# Altium PCB PCB.PcbDoc
Units mm, origin at the board's own origin, x right, y up, seen from the top; angles counter-clockwise.
Board outline 95 x 102.5 mm, 2 copper layers (Top Layer, Bottom Layer), stack 1.571 mm thick; 56 components, 43 nets, 162 pads, 1 vias.
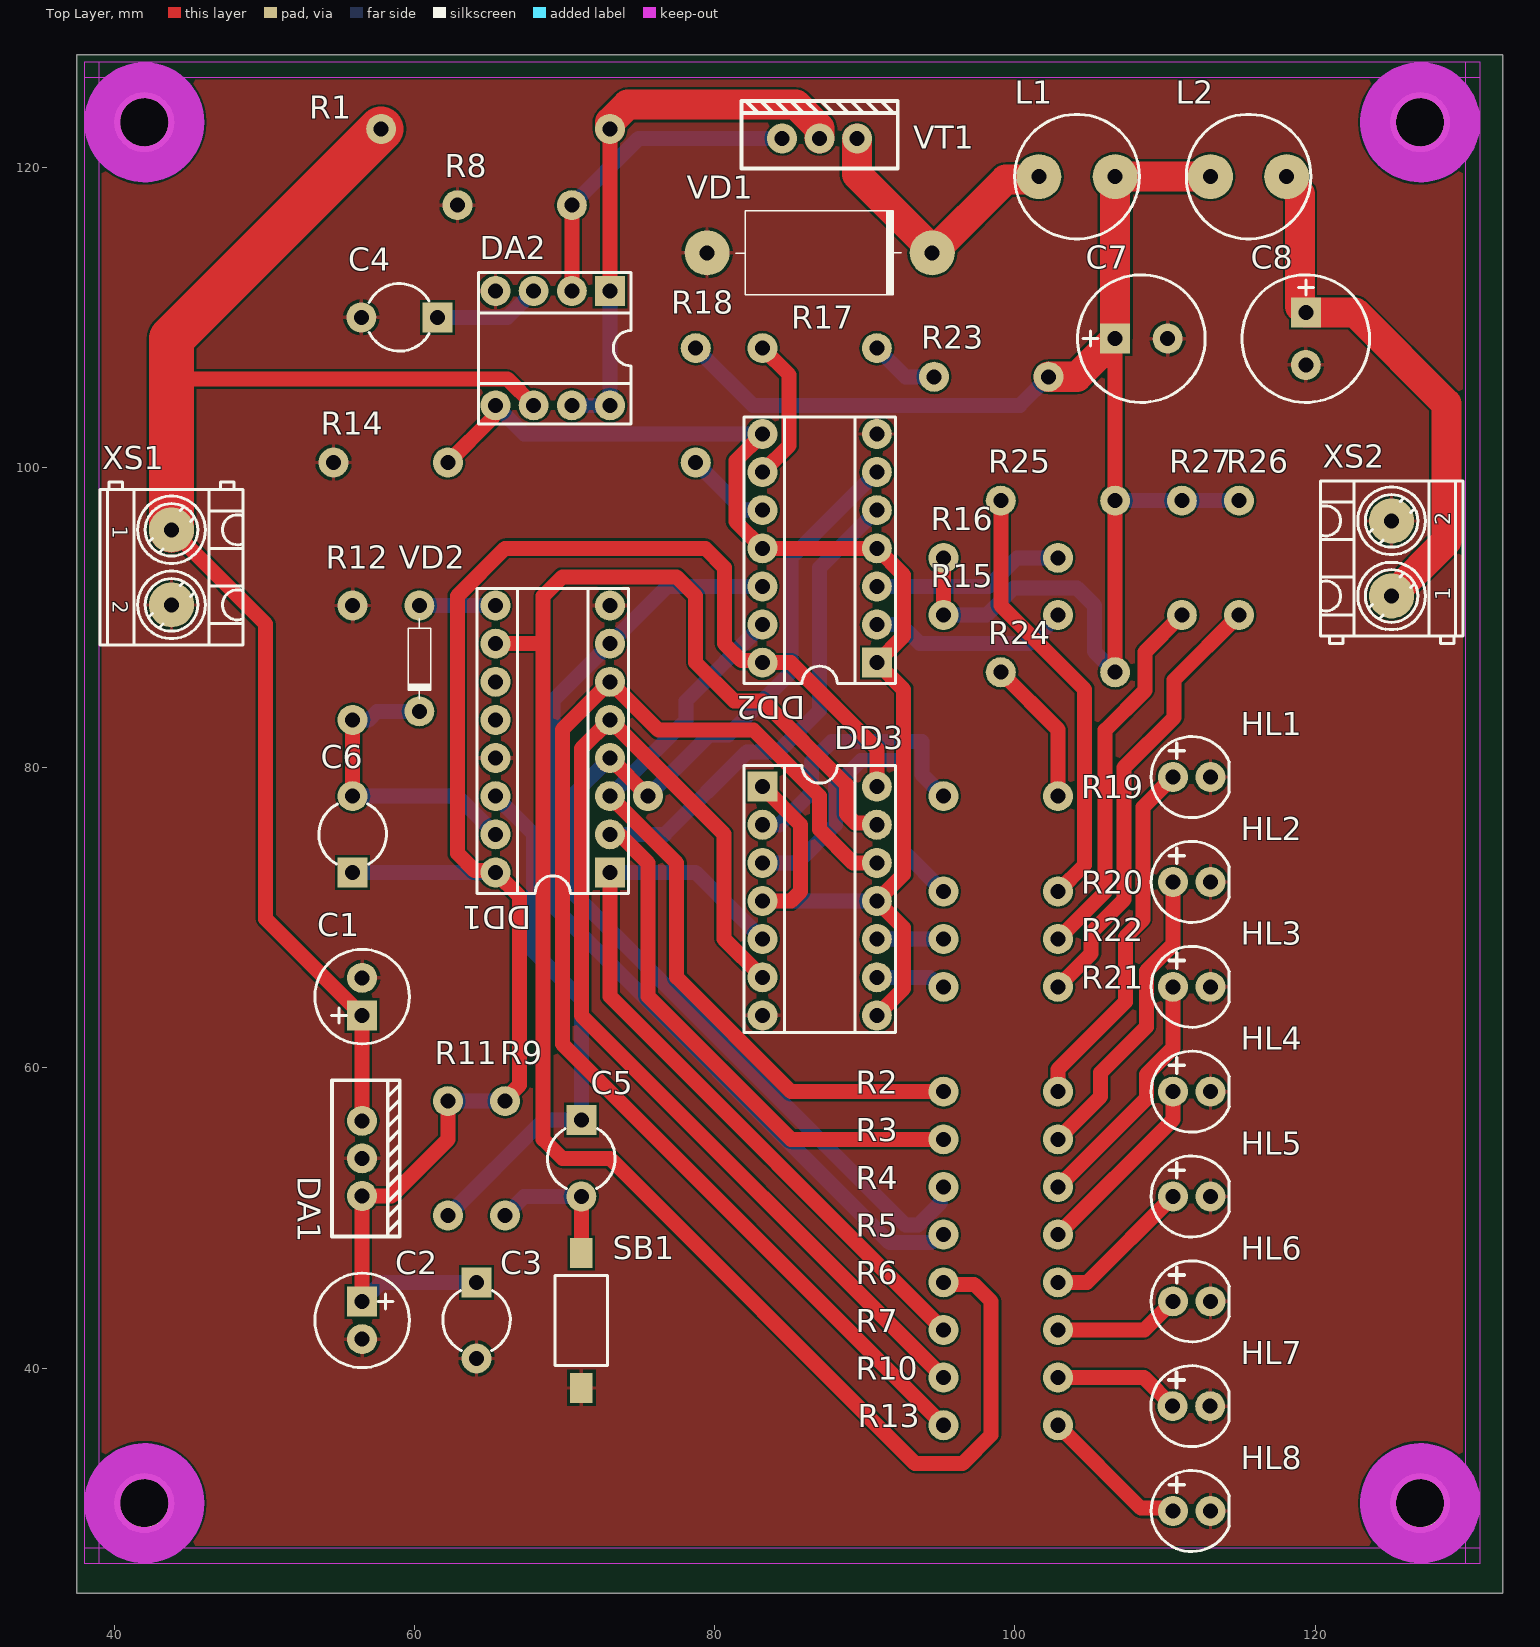
[diagram p0: Top Layer view]
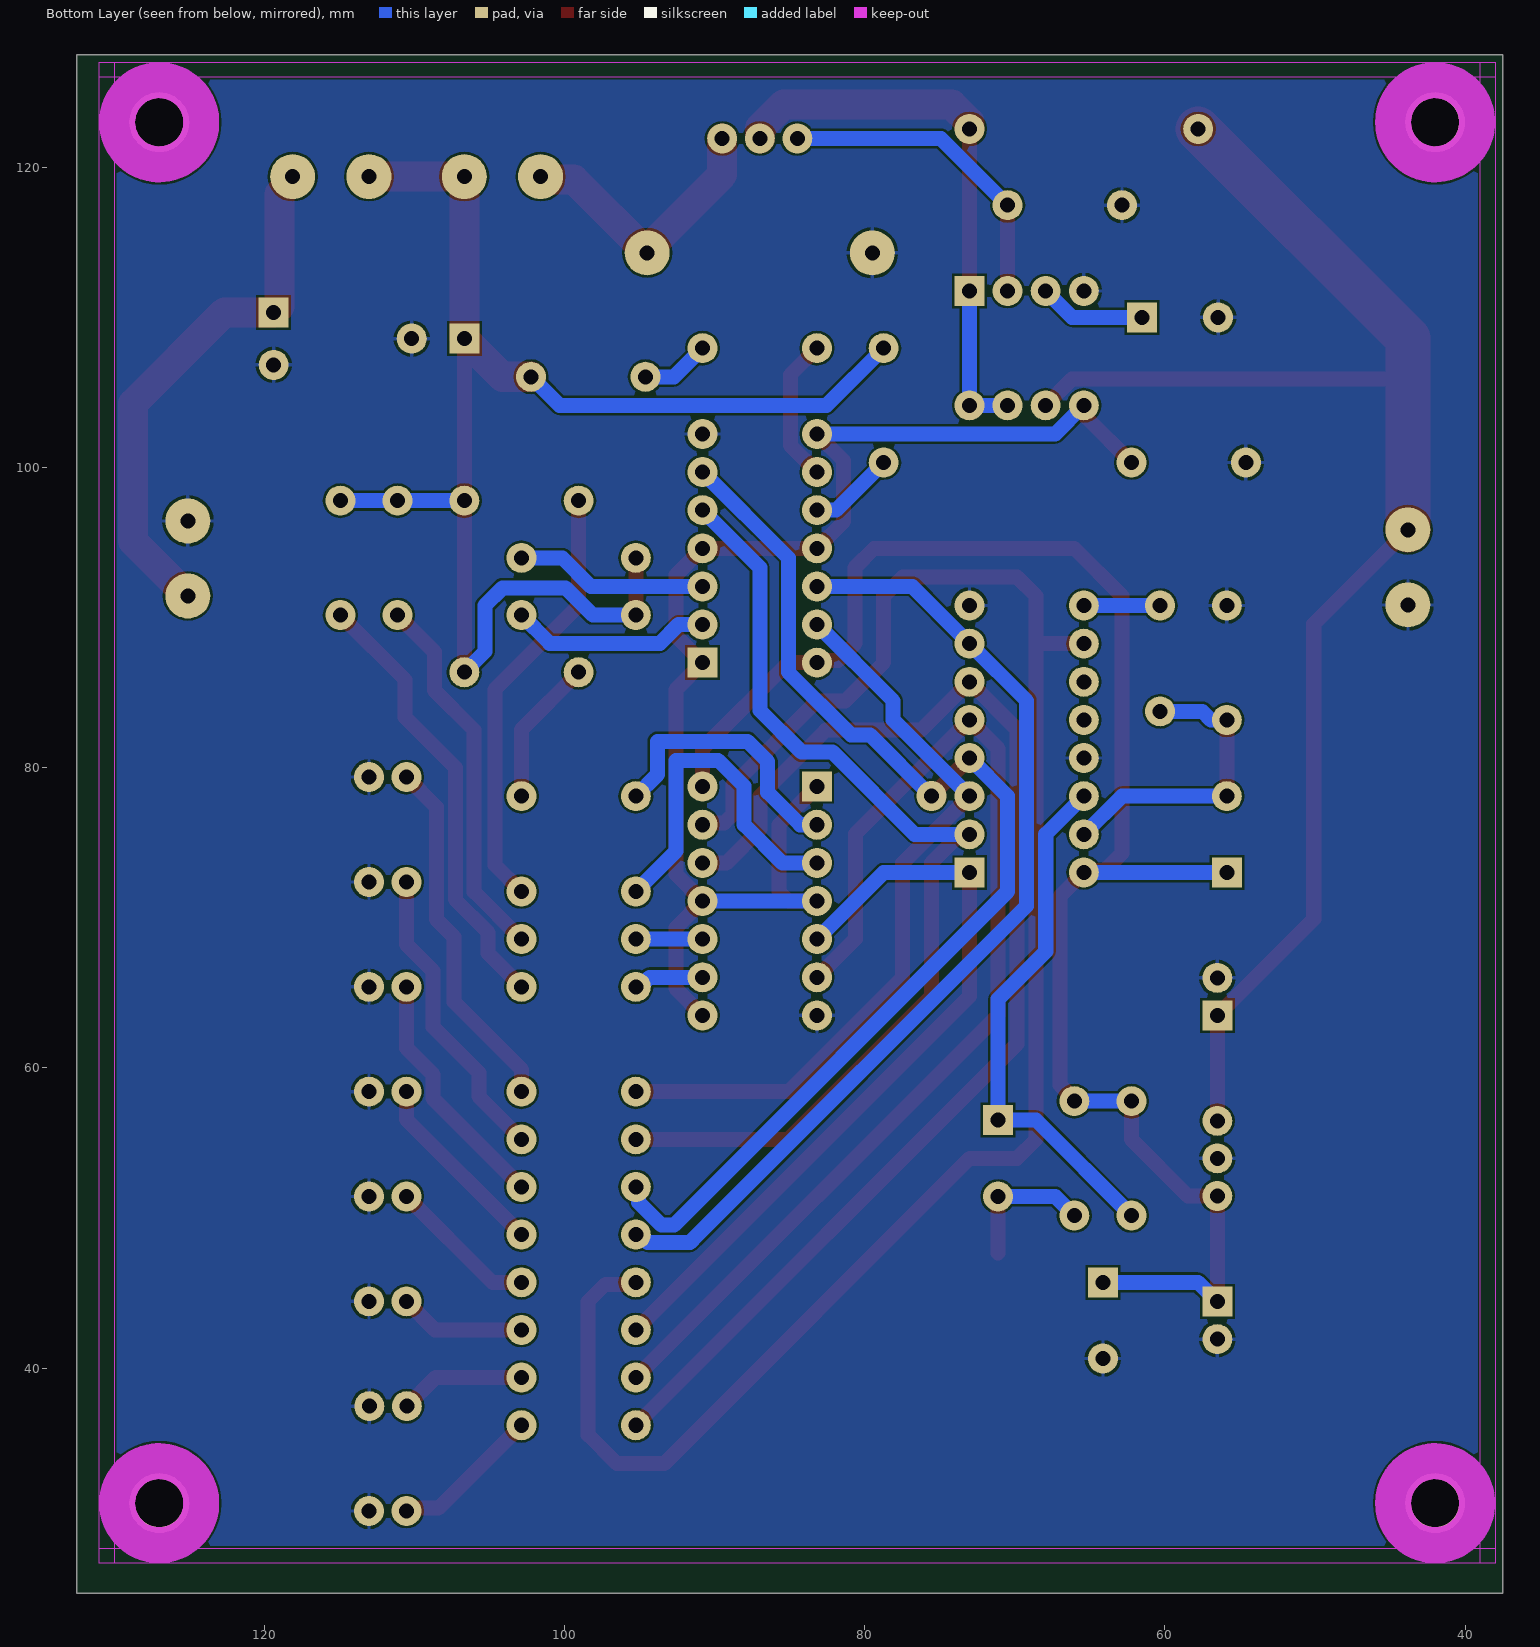
[diagram p1: Bottom Layer view, seen from below]
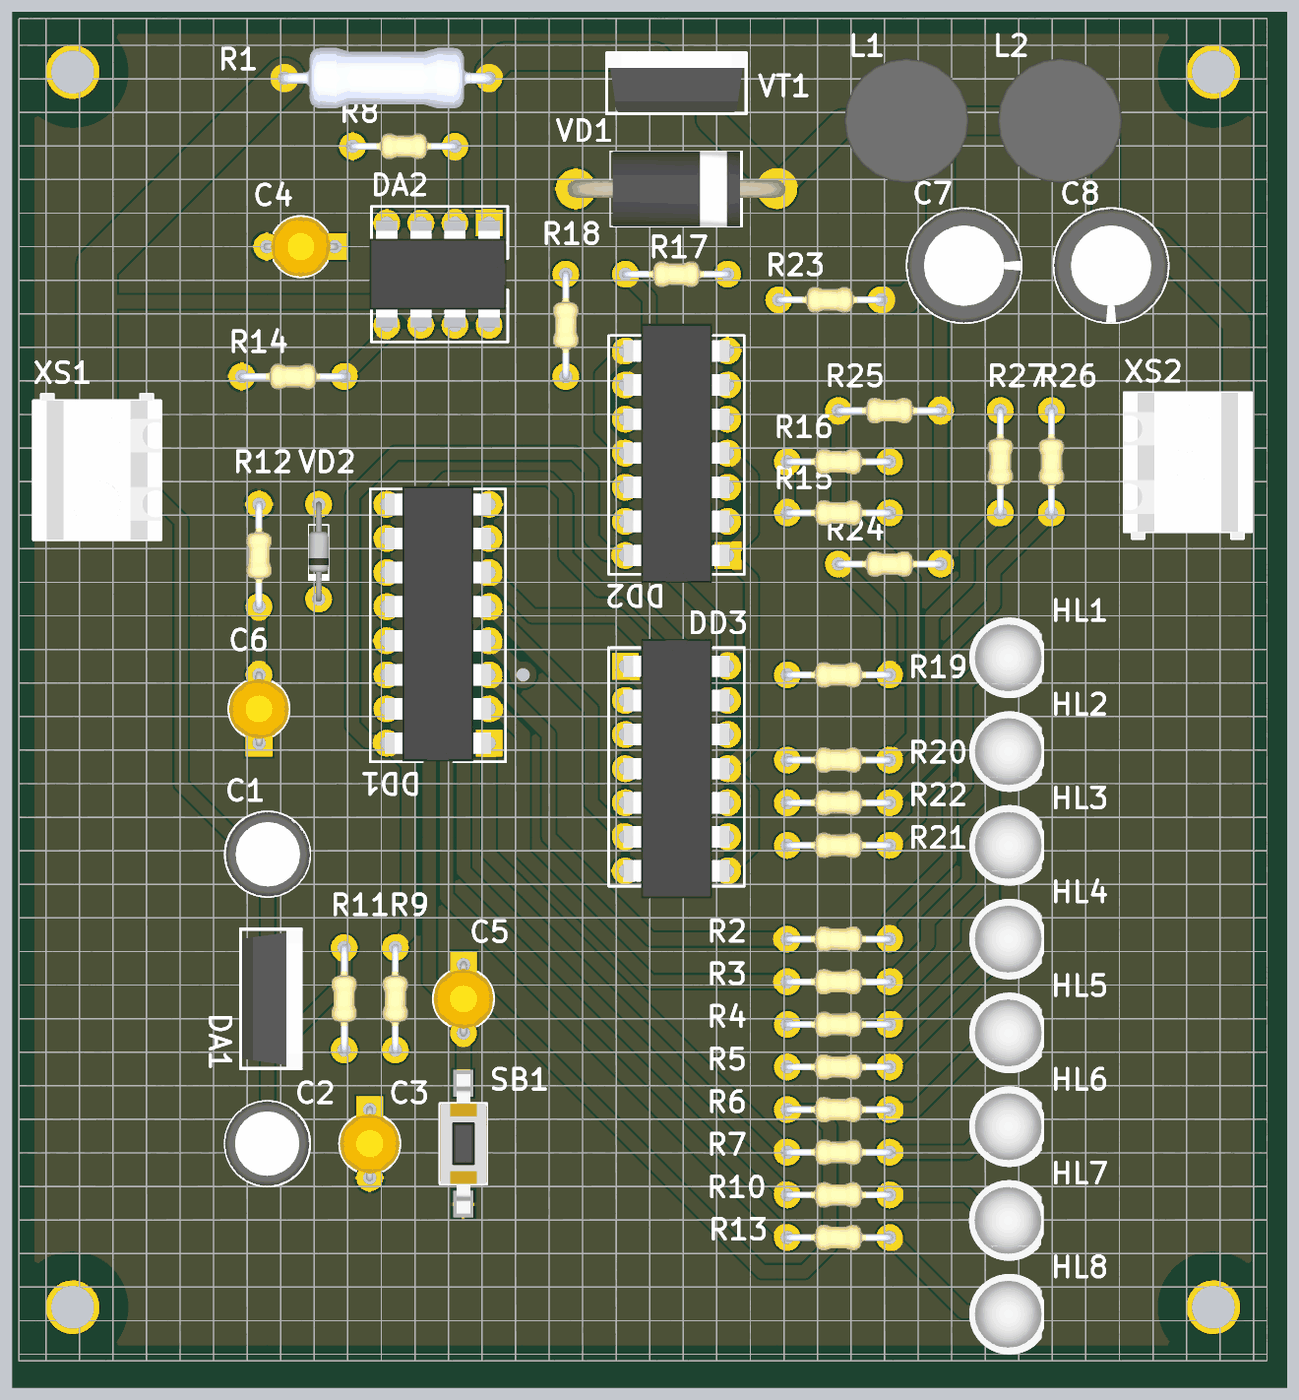
[diagram p2: 3D render of the assembled board from above, using the file's embedded part models]

## Layer stack, top to bottom
Top Solder: solder mask 0.0102, Solder Resist, Dk 3.5
Top Layer: signal copper 0.0356
Dielectric 1: dielectric 1.5, FR-4, Dk 4.8
Bottom Layer: signal copper 0.0356
Bottom Solder: solder mask 0.0102, Solder Resist, Dk 3.5

## Board outline
37.5,25 37.5,127.5 132.5,127.5 132.5,25

## Design rules (kind name [scope] priority, off if disabled: settings)
AcuteAngle [All] p1: minimum=3.50000000000000E+0001 checktracksonly=FALSE
BoardOutlineClearance "BoardOutlineClearance 1" [All] p1: gap=0.25 ignorepadtopadclearanceinfootprint=FALSE except(0: Arc-SplitContinuation Track-SplitContinuation SMDPad-SplitContinuation THPad-SplitContinuation Via-SplitContinuation Fill-SplitContinuation Poly-SplitContinuation Region-SplitContinuation Text-SplitContinuation) // Milling
Clearance "Clearance-1 1/2 Oz" [All] p1: gap=0.15 ignorepadtopadclearanceinfootprint=FALSE // Standart
ComponentClearance [All] p1: gap=0.1 collisioncheckmode=3 verticalgap=0.1 showdistances=FALSE
DiffPairsRouting "DiffPairsRouting 1/2 Oz" [All] p1: maxlimit=0.254 minlimit=0.125 mostfreqgap=0.254 toplayer_minwidth=0.125 toplayer_maxwidth=0.381 toplayer_prefwidth=0.381 bottomlayer_minwidth=0.125 bottomlayer_maxwidth=0.381 bottomlayer_prefwidth=0.381 maxuncoupledlength=12.7
Height [All] p1: minheight=0 maxheight=50 prefheight=12.7
HoleSize "Minimum HoleSize" [IsPad] p1: absolutevalues=TRUE maxlimit=5.9 minlimit=0.6 maxpercent=80.000 minpercent=20.000
HoleSize "Minimum HoleSize VIA 1" [IsVia] p2: absolutevalues=TRUE maxlimit=5.9 minlimit=0.3 maxpercent=80.000 minpercent=20.000 // Standart
HoleToHoleClearance Hole2HoleClearance [All] p1: gap=0.25 allowstackedmicrovias=FALSE
MinimumAnnularRing "Minimum AR VIA Standart" [All] p1: minimumring=0.15
MinimumAnnularRing "Minimum AR PAD Standart" [All] p2: minimumring=0.2
MinimumSolderMaskSliver "SolderMask Bridge Standart" [All] p1: minsoldermaskwidth=0.15 // All Masks
PlaneClearance "PlaneClearance-1 1/2 Oz" [All] p1: clearance=0.2 // Standart
PlaneConnect "TermalConnect-1 1/2 Oz" [All] p1: planeconnectstyle=Relief reliefexpansion=0.2 reliefentries=4 reliefconductorwidth=0.2 reliefairgap=0.2 // Standart
PolygonConnect "PolygonConnect-1 1/2 Oz" [All] p1: thpad.connectstyle=Relief thpad.reliefconductorwidth=0.254 thpad.reliefentries=4 thpad.polygonreliefangle="90 Angle" thpad.airgapwidth=0.2 smdpad.connectstyle=Relief smdpad.reliefconductorwidth=0.254 smdpad.reliefentries=4 smdpad.polygonreliefangle="90 Angle" smdpad.airgapwidth=0.2 via.connectstyle=Direct via.reliefconductorwidth=0.254 via.reliefentries=4 via.polygonreliefangle="90 Angle" via.airgapwidth=0.254 // Standart
RoutingCorners [All] p1 off: cornerstyle=45-Degree minsetback=2.54 maxsetback=2.54
RoutingVias [All] p1: holewidth=0.4 width=0.8 viastyle="Through Hole" minholewidth=0.3 minwidth=0.6 maxholewidth=5.9 maxwidth=8.9
SilkToSilkClearance Silk2SilkClearance [All] p1 off: silktosilkclearance=0.15
SilkToSolderMaskClearance Silk2SolderMaskClearance [IsPad] p1 off: minsilkscreentomaskgap=0.15 clearancetoexposedcopper=TRUE
SolderMaskExpansion SolderMaskExpansion-1 [All] p1: expansion=0.05 istentingtop=FALSE // Standart
UnRoutedNet [All] p1: checkbadconnections=TRUE
Width "Width 1/2 Oz" [All] p1: maxlimit=5 minlimit=0.75 preferedwidth=1 checkconnectedcopper=TRUE
18 further rules are at their usual default settings.

## Components (designator, comment, footprint, x,y, rotation, side; value= is the part's Value field where it differs from the comment)
C1 "100uF 25V" CAPPR250-630X1120 56.515,64.75 r90 top
C2 "100uF 25V" CAPPR250-630X1120 56.515,43.18 r270 top
C3 "Cap Ceramic 0.1uF" CAPPRB508-450X850 64.135,43.18 r270 top
C4 "Cap Ceramic 470pF" CAPPRB508-450X850 59,110 r180 top
C5 "Cap Ceramic 0.1uF" CAPPRB508-450X850 71.12,53.975 r270 top
C6 "Cap Ceramic 0.1uF" CAPPRB508-450X850 55.88,75.565 r90 top
C7 "470uF 25V" CAPPR350-850X1300 108.43,108.585 r0 top
C8 "470uF 25V" CAPPR350-850X1300 119.38,108.585 r270 top
DA1 "L7809ABV" TO-220AB 56.515,53.975 r270 top
DA2 "MC34063ABN" DIPS8-300 69.215,107.95 r270 top
DD1 "CD4017BE" DIPS16-300 69.215,81.915 r180 top
DD2 "CD4066BE" DIPS14-300 86.995,94.615 r180 top
DD3 "CD4066BE" DIPS14-300 86.995,71.12 r0 top
HL1 "LED Red" LD-5mm-R 111.78,79.375 r0 top
HL2 "LED Red" LD-5mm-R 111.78,72.39 r0 top
HL3 "LED Red" LD-5mm-R 111.78,65.405 r0 top
HL4 "LED Red" LD-5mm-R 111.78,58.42 r0 top
HL5 "LED Red" LD-5mm-R 111.78,51.435 r0 top
HL6 "LED Red" LD-5mm-R 111.78,44.45 r0 top
HL7 "LED Red" LD-5mm-R 111.76,37.465 r0 top
HL8 "LED Red" LD-5mm-R 111.78,30.48 r0 top
L1 "КИ (КИГ) 3,0−100мкГн ±5%" INDRD_WURTH_WE-TI 104.14,119.38 r0 top
L2 "КИ (КИГ) 3,0−100мкГн ±5%" INDRD_WURTH_WE-TI 115.57,119.38 r0 top
R1 "0,1Ом" "Res 1W" 66.675,116.205 r180 top
R2 "1кОм" "Res 0.125W" 96.52,58.42 r180 top
R3 "1кОм" "Res 0.125W" 96.52,55.245 r180 top
R4 "1кОм" "Res 0.125W" 96.52,52.07 r180 top
R5 "1кОм" "Res 0.125W" 96.52,48.895 r180 top
R6 "1кОм" "Res 0.125W" 96.52,45.72 r180 top
R7 "1кОм" "Res 0.125W" 96.52,42.545 r180 top
R8 "22кОм" "Res 0.125W" 69.215,117.475 r0 top
R9 "100кОм" "Res 0.125W" 66.04,56.515 r90 top
R10 "1кОм" "Res 0.125W" 96.52,39.37 r180 top
R11 "100кОм" "Res 0.125W" 62.23,56.515 r90 top
R12 "100кОм" "Res 0.125W" 55.88,84.455 r270 top
R13 "1кОм" "Res 0.125W" 96.52,36.195 r180 top
R14 "1кОм" "Res 0.125W" 60.96,100.33 r0 top
R15 "270Ом" "Res 0.125W" 96.52,90.17 r180 top
R16 "1кОм" "Res 0.125W" 96.52,93.98 r180 top
R17 "2кОм" "Res 0.125W" 89.535,107.95 r0 top
R18 "3,9кОм" "Res 0.125W" 78.74,106.68 r90 top
R19 "4,3кОм" "Res 0.125W" 101.6,78.105 r0 top
R20 "5,6кОм" "Res 0.125W" 101.6,71.755 r0 top
R21 "7,5кОм" "Res 0.125W" 101.6,65.405 r0 top
R22 "9,1кОм" "Res 0.125W" 101.6,68.58 r0 top
R23 "100Ом" "Res 0.125W" 100.965,106.045 r0 top
R24 "200Ом" "Res 0.125W" 105.41,86.36 r0 top
R25 "200Ом" "Res 0.125W" 105.41,97.79 r0 top
R26 "100Ом" "Res 0.125W" 114.935,96.52 r90 top
R27 "300Ом" "Res 0.125W" 111.125,96.52 r90 top
SB1 "Button SMD" "Button SMD" 71.12,43.18 r180 top
VD1 "1N5820" DO-27 86.995,114.3 r0 top
VD2 "1N4002" DO-35 60.325,87.28 r270 top
VT1 "TIP121G" TO-220AB 86.995,121.92 r0 top
XS1 "Power Connector 2 pin" WIELAND_25.161.0253.0 43.815,93.345 r270 top
XS2 "Power Connector 2 pin" WIELAND_25.161.0253.0 125.095,93.94 r90 top

## Footprints (in the part's own frame and the unit in brackets; to place one, negate y for a bottom-side part, rotate by r counter-clockwise, add the part's x,y. Pads: shape width x height; smd on the part's side, far side on the other; paste and mask are expansions set on the pad)
"Button SMD" [mm]
  rect 1.5x2 smd: 1(0,4.5) 2(0,-4.5)
  silkscreen extent -1.75,-3 1.75,3, body extent -1.75,-5.2 1.75,5.2, height 5.01
CAPPR250-630X1120 [mm] "Capacitor, Radial, Pin spacing 2.5mm - Body Diameter 6.3mm X Body Height 11.2mm"
  rect 2x2 hole 1: 1(-1.25,0)
  round 2 hole 1: 2(1.25,0)
  silkscreen extent -3.15,-3.15 3.15,3.15, body extent -3.16,-3.16 3.14,3.11, height 11.2
CAPPR350-850X1300 [mm] "Capacitor, Radial, Pin spacing 3.5mm - Body Diameter 8.5mm x Body Height 13mm"
  rect 2x2 hole 1: 1(-1.75,0)
  round 2 hole 1: 2(1.75,0)
  silkscreen extent -4.25,-4.25 4.25,4.25, body extent -4.25,-4.25 4.25,4.25, height 13
CAPPRB508-450X850 [mm] "Capacitor, Polarized Radial Bead, Pin spacing 5.08mm - Body Diameter 4.5mm X Body Height 8.5mm"
  rect 2x2 hole 1: 1(-2.54,0)
  round 2 hole 1: 2(2.54,0)
  silkscreen extent -1.98,-2.25 2.01,2.25, body extent -2.79,-2.25 2.79,2.25, height 8.97
DIPS8-300 [mm] "DIP Socket 8 Leads, Row Spacing 7.62 mm; Pitch 2.54 mm"
  rect 2x2 hole 1: 1(-3.81,3.81)
  round 2 hole 1: 2(-3.81,1.27) 3(-3.81,-1.27) 4(-3.81,-3.81) 5(3.81,-3.81) 6(3.81,-1.27) 7(3.81,1.27) 8(3.81,3.81)
  silkscreen extent -5.05,-4.95 5.05,5.21, body extent -3.96,-5.1 3.96,5.1, height 4.2
DIPS14-300 [mm] "DIP  Socket 14 Leads, Row Spacing 7.62 mm; Pitch 2.54 mm"
  rect 2x2 hole 1: 1(-3.81,7.62)
  round 2 hole 1: 2(-3.81,5.08) 3(-3.81,2.54) 4(-3.81,0) 5(-3.81,-2.54) 6(-3.81,-5.08) 7(-3.81,-7.62) 8(3.81,-7.62) 9(3.81,-5.08) 10(3.81,-2.54) 11(3.81,0) 12(3.81,2.54) 13(3.81,5.08) 14(3.81,7.62)
  silkscreen extent -5.05,-8.76 5.05,9.02, body extent -3.96,-9.65 3.96,9.65, height 3.4
DIPS16-300 [mm] "DIP Socket 16 Leads, Row Spacing 7.62 mm; Pitch 2.54 mm"
  rect 2x2 hole 1: 1(-3.81,8.89)
  round 2 hole 1: 2(-3.81,6.35) 3(-3.81,3.81) 4(-3.81,1.27) 5(-3.81,-1.27) 6(-3.81,-3.81) 7(-3.81,-6.35) 8(-3.81,-8.89) 9(3.81,-8.89) 10(3.81,-6.35) 11(3.81,-3.81) 12(3.81,-1.27) 13(3.81,1.27) 14(3.81,3.81) 15(3.81,6.35) 16(3.81,8.89)
  silkscreen extent -5.05,-10.03 5.05,10.29, body extent -3.96,-10.25 3.96,10.25, height 3.4
DO-27 [mm]
  round 3 hole 1: 1(-7.5,0) 2(7.5,0)
  silkscreen extent -5.6,-2.8 5.45,2.8, body extent -8.15,-2.81 8.15,2.81, height 5.59
DO-35 [mm]
  round 2 hole 1: 1(-3.525,0) 2(3.525,0)
  silkscreen extent -2.65,-0.8 2.67,0.75, body extent -3.73,-0.76 3.72,0.76, height 3.01
INDRD_WURTH_WE-TI [mm] "Radial Leaded Wire Wound Inductor D=8.3mm"
  round 3 hole 1: 1(-2.54,0) 2(2.54,0)
  silkscreen extent -4.15,-4.15 4.15,4.15, body extent -4.65,-4.65 4.65,4.65, height 10
LD-5mm-R [mm] "5mm DIP Red Led Footprint"
  round 2 hole 1: 1(-1.25,0) 2(1.25,0)
  silkscreen extent -2.7,-2.7 2.51,2.7, body extent -2.98,-3.01 2.44,3.01, height 13.31
"Res 0.125W" [mm]
  round 2 hole 1: 1(-6.35,0) 2(1.27,0)
  body extent -6.6,-0.95 1.52,0.95, height 2.45
"Res 1W" [mm]
  round 2 hole 1: 1(-6.35,-6.35) 2(8.89,-6.35)
  body extent -6.75,-8.6 9.29,-4.1, height 5.25
TO-220AB [mm] "КТ-28-2"
  round 2 hole 1: 1(-2.5,0) 2(0,0) 3(2.5,0)
  silkscreen extent -5.2,-2 5.2,2.5, body extent -5.1,-1.9 5.1,2.6, height 26.06
WIELAND_25.161.0253.0 [mm] "Terminal Block, Pitch 5mm, 2 Positions, Screw Connection"
  round 3 hole 1: 1(-2.5,0) 2(2.5,0)
  silkscreen extent -5.68,-4.75 5.17,4.75, body extent -5.67,-4.75 5.18,4.75, height 15

## Part data
C1 C2: library part "Cap Polarity 100uF 25V", "ECAP TKR101M1EE11 25В 100мкФ ±5% (Jamicon, Китай)", Type=Конденсатор
C3 C5 C6: "CAP X7R RDER71H104K 25В 0.1мкФ ±10% (Murata, Япония)", Type=Конденсатор
C4: "CAP NPO RDE5C1H471J 25В 470пкФ ±5% (Murata, Япония)", Type=Конденсатор
C7 C8: library part "Cap Polarity 470uF 25V", "ECAP TKR471M1EF14 25В 470мкФ ±5% (Jamicon, Китай)", Type=Конденсатор
DA1: "L7809ABV (STMicroelectronics, Швейцария)"
DA2: "MC34063ABN (STMicroelectronis, Швейцария)"
DD1: "CD4017BE (Texas Instuments, США)"
DD2 DD3: "CD4066BE (HGSEMI, Китай)"
HL1 HL2 HL3 HL4 HL5 HL6 HL7 HL8: "GNL-5012ED (G-nor Electronics, Китай)"
L1 L2: library part "Inductor КИ (КИГ) 3,0−100мкГн ±5%", "КИ (КИГ) 3,0−100мкГн ±10% (Россия)"
R1: library part "Res 0,1 1W", "С1-4−1−0,1Ом ±5% (Россия)"
R2 R3 R4 R5 R6 R7 R10 R13: library part "Res 1K 0.125W", "С1-4−0,125−1кОм ±5% (Россия)"
R8: library part "Res 22K 0.125W", "С1-4−0,125−22кОм ±5% (Россия)"
R9 R11 R12: library part "Res 100K 0.125W", "С1-4−0,125−100кОм ±5% (Россия)"
R14 R16: library part "Res 1,5K 0.125W", "С1-4−0,125−1,5кОм ±5% (Россия)"
R15: library part "Res 270 0.125W", "С1-4−0,125−270Ом ±5% (Россия)"
R17: library part "Res 2K 0.125W", "С1-4−0,125−2кОм ±5% (Россия)"
R18: library part "Res 3,9K 0.125W", "С1-4−0,125−3,9кОм ±5% (Россия)"
R19: library part "Res 4,3K 0.125W", "С1-4−0,125−4,3кОм ±5% (Россия)"
R20: library part "Res 5,6K 0.125W", "С1-4−0,125−5,6кОм ±5% (Россия)"
R21: library part "Res 7,5K 0.125W", "С1-4−0,125−7,5кОм ±5% (Россия)"
R22: library part "Res 9,1K 0.125W", "С1-4−0,125−9,1кОм ±5% (Россия)"
R23 R26: library part "Res 100 0.125W", "С1-4−0,125−100Ом ±5% (Россия)"
R24 R25: library part "Res 200 0.125W", "С1-4−0,125−200Ом ±5% (Россия)"
R27: library part "Res 300 0.125W", "С1-4−0,125−300Ом ±5% (Россия)"
SB1: library part Button, "Кнопка тактовая 1437566-3 (TE Connectivity, США)"
VD1: library part "Diode 1N5820", "1N5820 (Diotec, Германия)"
VD2: library part "Diode 1N4148", "1N4148 (Diotec, Германия)", Published=18.05.2010, Publisher="Andrew Danich", Type=Диод
VT1: library part "Transistor TIP121G", "TIP121G (ON Semiconductor, США)"
XS1 XS2: "25.161.0253.0 (Wieland Electric, Германия)"

## Free pads (board coordinates)
  round 4 hole 3.2 unplated: 0(42,31) 0(42,123) 0(127,31) 0(127,123)

## Via types
v1: diameter 2, hole 1, Top Layer to Bottom Layer, tented both sides, 1 vias

## Nets (pads, with @x,y where several pads share a name; then routed paths per layer and width w, separated by ;. In a path a pad name is that pad's centre, name@x,y a point inside that pad or via, vN(x,y) a via of type N, cw(c..) or ccw(c..) an arc to the next point about the centre after c; other vN are vias at no path point)
1: DD1.3 DD2.13 R2.2 | length 50.5
  Top Layer w1: DD1.3 77.47,73.66 77.47,66.04 85.09,58.42 R2.2
  Bottom Layer w1: DD1.3 78.105,83.185 78.105,84.455 DD2.13
2: DD1.2 DD2.5 R3.2 | length 68.2
  Top Layer w1: DD1.2 73.66,75.565 75.565,73.66 75.565,64.77 85.09,55.245 R3.2
  Bottom Layer w1: DD1.2 76.678,75.565 82.152,81.039 84.214,81.039 86.995,83.82 86.995,93.345 DD2.5
3: DD1.4 DD2.6 R4.2 | length 77.7
  Top Layer w1: DD1.4 v1(75.565,78.105)
  Bottom Layer w1: DD1.4 70.485,78.105 70.485,71.755 92.717,49.523 93.545,49.523 95.059,51.037 95.059,51.879 R4.2 ; v1(75.565,78.105) 79.648,82.188 80.918,82.188 85.09,86.36 85.09,93.98 DD2.6
4: DD1.7 DD2.12 R5.2 | length 66.3
  Bottom Layer w1: DD2.12 76.835,92.075 DD1.7 69.215,84.455 69.215,70.799 91.119,48.895 91.641,48.373 94.458,48.373 94.979,48.895 R5.2
5: DD1.10 DD3.13 R6.2 | length 124.9
  Top Layer w1: DD1.10 68.58,88.265 ; DD3.13 90.672,76.333 89.353,76.333 88.767,76.919 88.767,78.873 83.185,84.455 81.28,84.455 78.74,86.995 78.74,91.44 77.47,92.71 69.85,92.71 68.58,91.44 68.58,88.265 ; R6.2 95.383,45.587 97.288,45.587 98.425,44.45 98.425,35.56 96.52,33.655 93.345,33.655 73.025,53.975 69.85,53.975 68.58,55.245 68.58,88.265
6: DD1.1 DD3.5 R7.2 | length 51.7
  Top Layer w1: DD1.1 73.025,64.77 R7.2
  Bottom Layer w1: DD1.1 78.74,73.025 DD3.5
7: DD1.5 DD3.6 R10.2 | length 76
  Top Layer w1: DD3.6 80.628,68.597 80.628,75.582 DD1.5 71.12,81.28 71.12,63.5 R10.2
8: DD1.6 DD3.12 R13.2 | length 85.4
  Top Layer w1: DD3.12 89.214,73.66 86.995,75.879 86.995,78.105 82.601,82.499 76.251,82.499 DD1.6 69.85,82.55 69.85,61.595 R13.2
GND: C1.2 C2.2 C3.2 C4.2 C7.2 C8.2 DA1.2 DA2.4 DD1.8 DD1.13 DD2.7 DD3.7 HL1.2 HL2.2 HL3.2 HL4.2 HL5.2 HL6.2 HL7.2 HL8.2 R8.1 R12.1 R14.1 SB1.1 VD1.1 XS1.2 XS2.2
NetC1_1: C1.1 DA1.1 DA2.6 R1.2 XS1.1 | length 101.8
  Top Layer w1: XS1.1 50.089,89.571 50.089,69.926 C1.1 DA1.1 ; 44,105.894 66.191,105.894 DA2.6
  Top Layer w3: XS1.1 43.815,108.585 R1.2
NetC2_1: C2.1 C3.1 C6.1 DA1.3 DD1.16 DD2.14 DD3.14 R9.2 R11.2 | length 115.2
  Top Layer w1: C2.1 DA1.3 58.475,51.475 62.23,55.23 R11.2 ; R9.2 66.04,57.911 67,58.871 67,71.43 DD1.16 65.272,73.158 64.002,73.158 62.865,74.295 62.865,91.44 66.04,94.615 79.375,94.615 80.645,93.345 80.645,88.265 81.782,87.128 83.052,87.128 DD2.14 85.09,86.995 90.805,81.28 DD3.14
  Bottom Layer w1: C6.1 DD1.16 ; C2.1 57.805,45.72 C3.1 ; R11.2 R9.2
NetC4_1: C4.1 DA2.3 | length 7.1
  Bottom Layer w1: C4.1 66.185,110 DA2.3
NetC5_1: C5.1 DD1.14 R11.1 | length 35.5
  Bottom Layer w1: R11.1 68.58,56.515 C5.1 71.12,64.582 67.943,67.759 67.943,75.567 DD1.14
NetC5_2: C5.2 R9.1 SB1.2 | length 9.4
  Top Layer w1: SB1.2 C5.2
  Bottom Layer w1: R9.1 67.31,51.435 C5.2
NetC6_2: C6.2 DD1.15 R12.2 VD2.2 | length 20.3
  Top Layer w1: C6.2 R12.2
  Bottom Layer w1: C6.2 62.865,78.105 DD1.15 ; R12.2 56.947,83.185 57.517,83.755 VD2.2
NetC7_1: C7.1 L1.2 L2.1 R15.2 R16.2 R18.2 R23.2 R24.2 R25.2 R26.2 R27.2 | length 99.1
  Top Layer w1: R15.2 R16.2 ; R24.2 R25.2 C7.1
  Top Layer w2: R23.2 104.14,106.045 C7.1 L1.2 L2.1
  Bottom Layer w1: R18.2 82.55,104.14 100.33,104.14 R23.2 ; R15.2 98.12,90.17 99.924,91.973 104.14,91.973 105.308,90.805 105.308,87.732 R24.2 ; R25.2 R27.2 R26.2
NetC8_1: C8.1 L2.2 XS2.1 | length 35.2
  Top Layer w2: L2.2 118.11,119.109 119,118.219 C8.1@119,110.715 ; C8.1 122.665,110.335 128.746,104.254 128.746,95.091 XS2.1
NetDA2_1: DA2.1 DA2.7 DA2.8 R1.1 VT1.2 | length 37.2
  Top Layer w1: DA2.1 R1.1
  Top Layer w2: R1.1 73.025,123.002 74.197,124.174 85.429,124.174 86.995,122.608 VT1.2
  Bottom Layer w1: DA2.7 DA2.8 DA2.1
NetDA2_2: DA2.2 R8.2 VT1.1 | length 21.6
  Top Layer w1: DA2.2 R8.2
  Bottom Layer w1: R8.2 74.93,121.92 VT1.1
NetDA2_5: DA2.5 DD2.1 DD2.4 DD2.8 DD2.11 DD3.1 DD3.4 DD3.8 DD3.11 R14.2 | length 94.4
  Top Layer w1: R14.2 65.214,103.314 65.214,103.949 DA2.5 ; DD3.4 85.09,71.12 85.725,71.755 85.725,76.2 DD3.1 ; DD2.8 81.407,100.457 81.407,96.393 DD2.11 DD2.4 92.583,92.837 92.583,88.773 DD2.1 92.583,85.217 92.583,72.898 DD3.11 92.583,69.342 92.583,65.278 DD3.8
  Bottom Layer w1: DA2.5 67.31,102.235 DD2.8 ; DD3.4 DD3.11
NetDD1_9: DD1.9 VD2.1 | length 5.1
  Bottom Layer w1: VD2.1 DD1.9
NetDD2_2: DD2.2 R15.1 | length 13.4
  Bottom Layer w1: DD2.2 92.405,89.535 93.65,88.29 100.99,88.29 R15.1
NetDD2_3: DD2.3 R16.1 | length 12.9
  Bottom Layer w1: DD2.3 98.247,92.075 100.152,93.98 R16.1
NetDD2_9: DD2.9 R17.1 | length 9.7
  Top Layer w1: DD2.9 84.963,101.473 84.963,106.172 R17.1
NetDD2_10: DD2.10 R18.1 | length 5.8
  Bottom Layer w1: R18.1 81.915,97.155 DD2.10
NetDD3_2: DD3.2 R19.1 | length 18.4
  Bottom Layer w1: DD3.2 84.303,76.2 86.467,78.364 86.467,80.418 87.797,81.748 93.813,81.748 93.813,79.542 R19.1
NetDD3_3: DD3.3 R20.1 | length 23.6
  Bottom Layer w1: DD3.3 85.496,73.66 88.036,76.2 88.036,78.765 89.765,80.494 92.559,80.494 92.559,74.446 R20.1
NetDD3_9: DD3.9 R21.1 | length 4.7
  Bottom Layer w1: DD3.9 94.344,66.04 94.979,65.405 R21.1
NetDD3_10: DD3.10 R22.1 | length 4.4
  Bottom Layer w1: DD3.10 R22.1
NetHL1_1: HL1.1 R2.1 | length 24.1
  Top Layer w1: R2.1 102.87,59.908 107.366,64.404 107.366,68.729 108.528,69.891 108.528,77.373 HL1.1
NetHL2_1: HL2.1 R3.1 | length 20.3
  Top Layer w1: R3.1 105.705,58.08 105.705,59.68 108.763,62.738 108.763,66.456 110.53,68.223 HL2.1
NetHL3_1: HL3.1 R4.1 | length 16.5
  Top Layer w1: R4.1 108.763,57.963 108.763,59.563 110.53,61.33 HL3.1
NetHL4_1: HL4.1 R5.1 | length 12.7
  Top Layer w1: R5.1 110.53,56.555 HL4.1
NetHL5_1: HL5.1 R6.1 | length 10
  Top Layer w1: R6.1 104.815,45.72 HL5.1
NetHL6_1: HL6.1 R7.1 | length 8.4
  Top Layer w1: R7.1 108.625,42.545 HL6.1
NetHL7_1: HL7.1 R10.1 | length 8.4
  Top Layer w1: R10.1 108.605,39.37 HL7.1
NetHL8_1: HL8.1 R13.1 | length 10
  Top Layer w1: R13.1 108.394,30.671 110.339,30.671 HL8.1
NetL1_1: L1.1 VD1.2 VT1.3 | length 18.9
  Top Layer w2: VT1.3 89.495,119.505 94.495,114.505 VD1.2 99.384,119.189 101.409,119.189 L1.1
NetR17_2: R17.2 R23.1 | length 4.6
  Bottom Layer w1: R17.2 92.71,106.045 R23.1
NetR19_2: R19.2 R24.1 | length 9.8
  Top Layer w1: R24.1 102.87,82.55 R19.2
NetR20_2: R20.2 R25.1 | length 29.1
  Top Layer w1: R25.1 99.06,90.805 104.648,85.217 104.648,73.533 R20.2
NetR21_2: R21.2 R26.1 | length 29.8
  Top Layer w1: R21.2 105.084,67.619 105.084,69.021 107.274,71.21 107.274,80.01 110.617,83.353 110.617,85.852 R26.1
NetR22_2: R22.2 R27.1 | length 25
  Top Layer w1: R22.2 106.02,71.73 106.02,82.502 108.661,85.144 108.661,87.706 R27.1
pads on no net: DD1.11 DD1.12

## Polygon pours and split planes (outlines as drawn)
no net on Top Overlay "NONET_L-01_P-001" (solid, remove dead copper): 38,127 38,27 131,27 131,127
GND on Top Layer "Top Layer-GND" (solid, pour order 3): 38,27 131,27 131,127 38,127
no net on Top Paste "NONET_L-01_P-001" (hatched 90Degree grid 2.5 track 0.1): 38,127 38,27 131,27 131,127
GND on Bottom Layer "GND_L02_P004" (solid, pour order 4): 38,27 131,27 131,127 38,127
no net on Bottom Paste (hatched 90Degree grid 2.5 track 0.1, pour order 5): 38,27 131,27 131,127 38,127
no net on Mechanical 7 (hatched 90Degree grid 2.5 track 0.1, pour order 8): 37.5,25 37.5,127.5 132.5,127.5 132.5,25

## Keep-outs
Keep-Out Layer:
  circle w2.4: c127,31 r2.8
  circle w2.4: c127,123 r2.8
  circle w2.4: c42,123 r2.8
  circle w2.4: c42,31 r2.8
  rectangle: 38,27 39,127
  rectangle: 38,126 131,127
  rectangle: 130,27 131,127
  rectangle: 38,27 131,28

## Silkscreen, mask and mechanical layers (free items; w line width, h text height)
Mechanical 1:
  the board outline again, w0.3

## Text inside footprints (layer, text, board x,y; h text height)
XS1: Top Overlay "2" at 39.893,91.126 h1 r270; Top Overlay "1" at 39.893,96.125 h1 r270; Mechanical 14 "1" at 39.893,96.125 h1 r270; Mechanical 14 "2" at 39.893,91.126 h1 r270
XS2: Top Overlay "2" at 129.017,96.159 h1 r90; Top Overlay "1" at 129.017,91.16 h1 r90; Mechanical 14 "1" at 129.017,91.16 h1 r90; Mechanical 14 "2" at 129.017,96.159 h1 r90